# EAGLE board rw-directish-17mm-mk-1.3 (EAGLE 7.5.0)
VERSION: v1.3
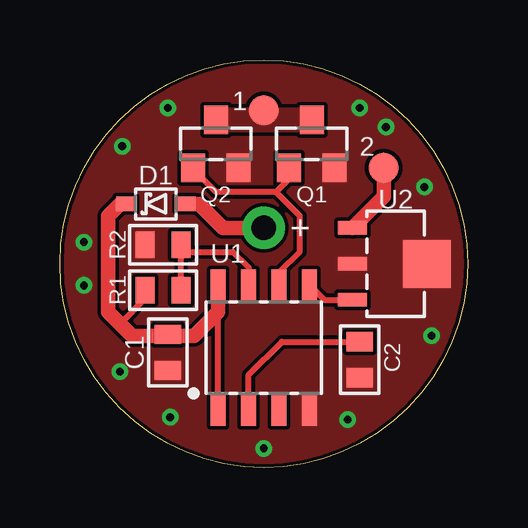
[diagram p0: board, top side]
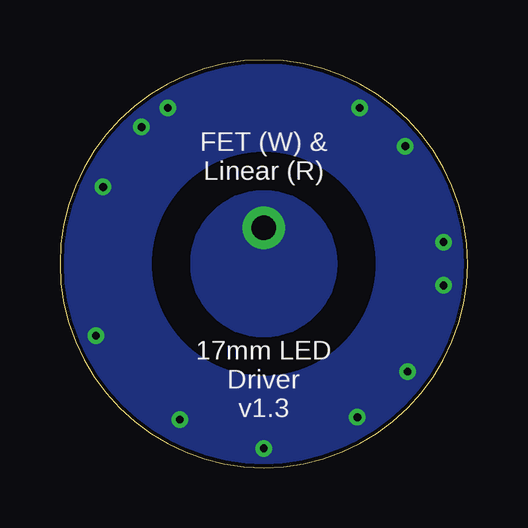
[diagram p1: board, bottom side, seen from below]

Size 17 x 17 mm. Coordinates in mm from the lower left corner, seen from the top.
Outline: 0,8.5 arc-180 17,8.5 arc-180 0,8.5
Copper layers (1*16): Top 0.0356mm / dielectric 1.5011mm / Bottom 0.0356mm
Design rules "LaenPCBOrder2 *": minimum track width 6mil, minimum drill 13mil, track to track 6mil, track to pad 6mil, pad to pad 6mil, via to via 6mil, smd to smd 6mil, copper to edge 6mil, drill to drill 6mil, minimum pad ring 7mil, minimum via ring 7mil, stop-mask expansion 3mil, vias tented up to drill 20mil, thermal gap 10mil
bRestrict: area 4.5,4.5 to 12.5,12.5

## Footprints (pad centres in the part's own frame; a part is rotated, then mirrored left to right if it is on the bottom)
1X01-SMD-1.25MM-DIA-NS = smd 1.25 x 1.25: P$1 0,0
1X01-1MM-CIR-NS = drill 1.016 pad 1.778: 1 0,0
1X01_NOSILK_NOSTOP = drill 0.33: P$1 0,0
C0603-TIGHTER = smd 0.8 x 1.1: 1 -0.75,0; 2 0.75,0
SOD323-SCHOTTKY = smd 0.8 x 0.6: A -1.25,0; C 1.25,0
SOT23 = smd 1 x 1.2: 1 -0.95,-1; 2 0.95,-1; 3 0,1
R0603-TIGHTER = smd 0.8 x 1.1: 1 -0.75,0; 2 0.75,0
SO08-NARROWER = smd 0.635 x 1.27: 1 -1.905,-2.616; 2 -0.635,-2.616; 3 0.635,-2.616; 4 1.905,-2.616; 5 1.905,2.616; 6 0.635,2.616; 7 -0.635,2.616; 8 -1.905,2.616
SOT89-NOTHERM = smd 0.58 x 1.2: 1 -1.5,-1.8; 3 1.5,-1.8; 4@1 0,-1.8 | smd 2 x 2: 4@2 0,1.3

## Placement (x,y rotation side)
1  M01SMD-1.25MM-DIA  [1X01-SMD-1.25MM-DIA-NS]  8.5,14.9 270 top
2  M01SMD-1.25MM-DIA  [1X01-SMD-1.25MM-DIA-NS]  13.5,12.5 0 top
+  M01PTH-1MM-CIR-NS  [1X01-1MM-CIR-NS]  8.5,10 180 top
-  M01NOT-A-VIA-NOPE  [1X01_NOSILK_NOSTOP]  2.5,4 90 bottom
C1  1u  [C0603-TIGHTER]  4.5,4.8 270 top
C2  1u  [C0603-TIGHTER]  12.5,4.5 270 top
D1  BAT165  [SOD323-SCHOTTKY]  4,11 180 top
FRAME1  FRAME-LETTERNO_PACKAGE  [DUMMY]  0,0 0 top
Q1  MOSFET-NCHANNELIRLML2502  [SOT23]  10.5,13.5 0 top
Q2  MOSFET-NCHANNELIRLML2502  [SOT23]  6.5,13.5 0 top
R1  19K  [R0603-TIGHTER]  4.3,7.4 180 top
R2  4K7  [R0603-TIGHTER]  4.3,9.3 0 top
U1  ATTiny13  [SO08-NARROWER]  8.5,5 0 top
U2  AMC7135SOT-89-NOTHERM  [SOT89-NOTHERM]  14,8.5 270 top

## Library data of the parts
1 2 + - C1 C2 D1 Q1 Q2 R1 R2 U1 U2 = a_parts
FRAME1 = a_parts; DESIGNER: sean@yak.net; VERSION: v1.3

## Nets
GND: -.P$1 C1.2 C2.2 Q1.2 Q2.2 R2.1 U1.4 U2.4@1 U2.4@2
N$1: R1.1 R2.2 U1.7
N$2: C2.1 U1.2
PWM_R: U1.5 U2.3
PWM_W: Q1.1 Q2.1 U1.6
R: 2.P$1 U2.1
VBAT: +.1 D1.A
VCC: C1.1 D1.C R1.2 U1.1 U1.8
W: 1.P$1 Q1.3 Q2.3

## Tracks (layer width: path | path; a pad name or v marks a point on that pad's centre or on a via)
GND  (via drill 0.33)
  other vias: 1,7.6 12.5,15 2.6,13.4 4.5,15 1,9.4 8.5,0.8 15.5,5.5 13.6,14.2 15.2,11.7 12,2 4.6,2.1
  pour Top (isolate 0.152, rank 6, no thermals): 0,0 17,0 17,17 0,17
  pour Bottom (isolate 0.152, rank 6, no thermals): 0,0 0,17 17,17 17,0
N$1
  Top 0.25: U1.7 7.87,8.34 7.2,9 5.35,9 R2.2 R1.1
N$2
  Top 0.25: U1.2 7.87,3.87 9.25,5.25 C2.1
PWM_R
  Top 0.25: U1.5 11.02,7 U2.3
PWM_W
  Top 0.25: Q2.1 5.55,12.45 6.5,11.5 9,11.5 | Q1.1 9.5,12.5 9.5,12 9,11.5 | U1.6 9.13,8.13 10,9 10,10.5 9,11.5
R
  Top 0.6: U2.1 13.5,11.3 2.P$1
VBAT
  Top 0.6: D1.A 5.8,11 6.8,10 +.1
  pour Bottom (isolate 0.152, no thermals): 5.5,8.5 arc-180 11.5,8.5 arc-180
VCC
  Top 0.25: R1.2 3.55,7.05 2.5,6 | C1.1 4.55,5.5 4.6,5.5 | U1.1 6.59,6.5 6.6,6.5
  Top 0.6: D1.C 2.5,11 2,10.5 2,6.5 2.5,6 3,5.5 4.6,5.5 5.6,5.5 6.6,6.5 U1.8
W
  pour Top (isolate 0.152, no thermals): 6.5,14.9 10.5,14.9 10.5,14.1 6.5,14.1

## Text on the board
bPlace: FET (W) & / Linear (R) | 17mm LED / Driver